# Allegro board CC26xx_4x4_Ext_Reg_lvl_shifter.brd
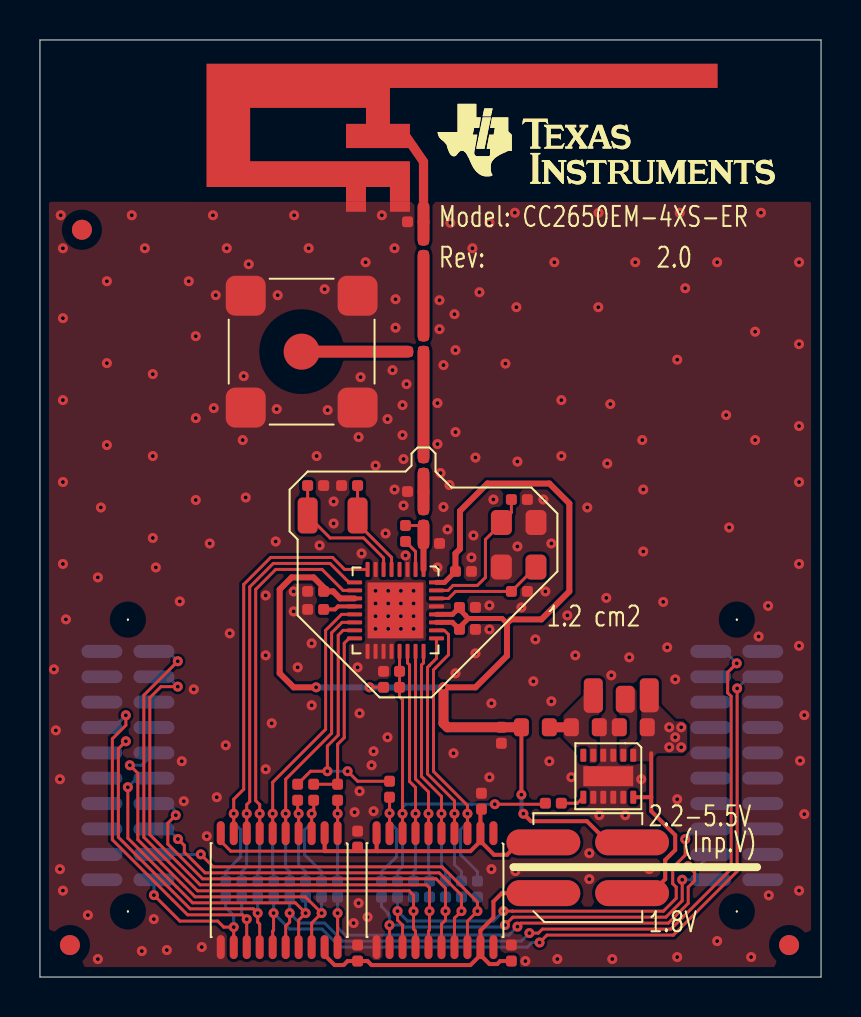
[diagram p0: board, top side]
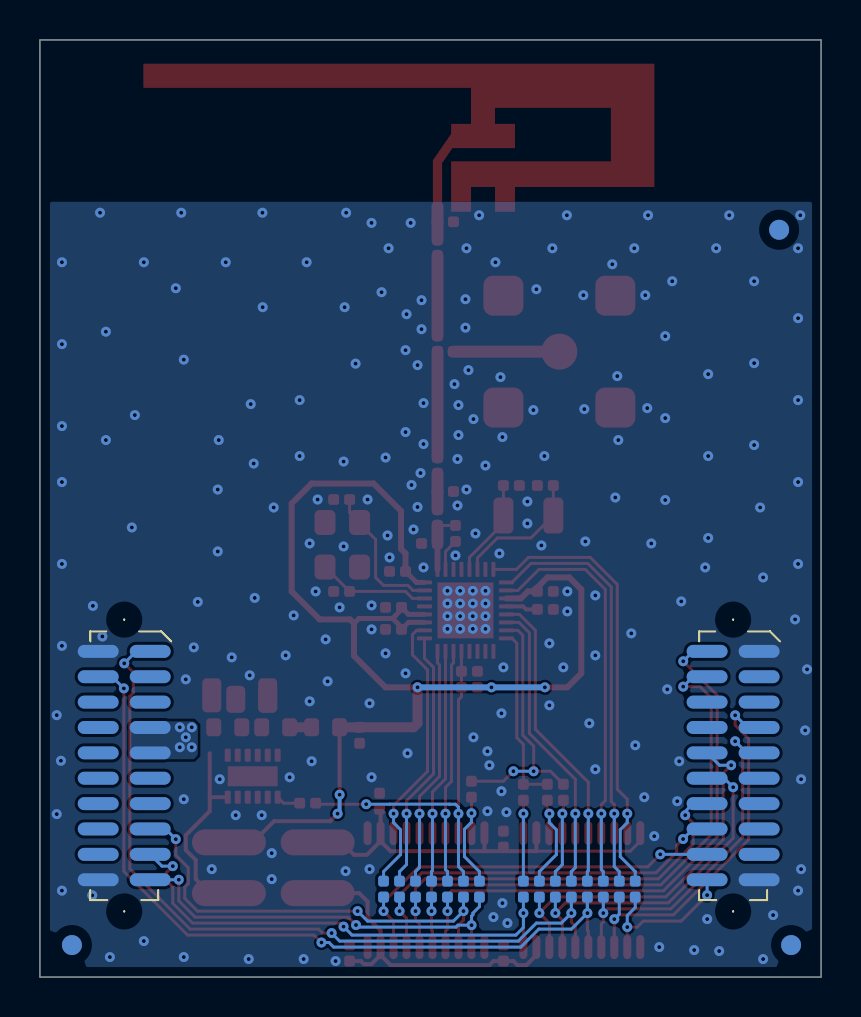
[diagram p1: board, bottom side, seen from below]

Outline 39.1 x 46.9 mm; copper layers: TOP, BOTTOM. Coordinates in mm from the lower left corner of the outline.
Outline path: 0,46.9 0,0 39.1,0 39.1,46.9 0,46.9

## Placement (name value [footprint] x y rotation side)
A1  2.4GHz  [ANTENNA_DN007N]  19.2 38.55 0 top
C2  2.2uF  [CAPC1005X60L]  23.1 12.5 270 top
C3  100nF  [CAPC1005X60L]  14.2 19.3 180 top
C4  100nF  [CAPC1005X60L]  21 17.4 0 top
C5  10uF  [CAPC1608X90L]  30.4 12.5 180 top
C8  10uF  [CAPC1608X90L]  26.6 12.5 0 top
C9  100nF  [CAPC1005X60L]  21 18.5 0 top
C12  1.2pF  [CAPC1005X60L]  19.2 21.7 0 top
C13  1.2pF  [CAPC1005X60L]  19.2 24.3 180 top
C14  12pF  [CAPC1005X60L]  19.2 25.2 90 top
C15  DNM  [CAPC1005X60L]  19.2 37.8 180 top
C16  100nF  [CAPC1005X60L]  20.8 20.3 0 top
C17  12pF  [CAPC1005X60L]  15.9 24.6 180 top
C18  12pF  [CAPC1005X60L]  13.4 24.6 0 top
C19  1uF  [CAPC1005X60L]  14.2 18.4 180 top
C20  100nF  [CAPC1005X60L]  18 15.3 180 top
C22  DNM  [CAPC1005X60L]  23.6 19.3 0 top
C23  DNM  [CAPC1005X60L]  23.6 23.9 0 top
C24  100nF  [CAPC1005X60L]  15.9 6.5 90 top
C25  100nF  [CAPC1005X60L]  15.9 0.8 90 top
C26  100nF  [CAPC1005X60L]  22.1 8.4 90 top
C27  100nF  [CAPC1005X60L]  23.6 0.8 90 top
FIDU1  FIDU_1MM  [FID100X115]  1.5 1.6 0 top
FIDU2  FIDU_1MM  [FID100X115]  2.1 37.4 0 top
FIDU3  FIDU_1MM  [FID100X115]  37.5 1.6 0 top
FIDU4  FIDU_1MM  [FID100X115]  1.5 1.6 180 bottom
FIDU5  FIDU_1MM  [FID100X115]  2.1 37.4 180 bottom
FIDU6  FIDU_1MM  [FID100X115]  37.5 1.6 180 bottom
FL1  BLM18HE152SN1  [FIL_BLM18HE152SN1DL]  24.1 12.5 0 top
J1  SMA-10V21-TGG  [HUSTSAN_SMA10V21TGGAN]  13.1 31.3 0 top
L1  2.2uH  [INDC2012X100L]  29.3 13.9 180 top
L12  2nH  [INDC1005X60L]  19.2 22.6 90 top
L21  15nH  [INDC1005X60L]  18.3 21.8 90 top
NOREF  -  []  0 45.86 0 top
NOREF#2  -  []  20.9 43.7 0 top
NOREF#3  -  []  33.58 0 90 top
P1  SFM-110-02-S-D-A-K-TR  [SAMTEC_SFM11002AN]  3.1 16.3 0 bottom
P2  SFM-110-02-S-D-A-K-TR  [SAMTEC_SFM11002AN]  33.58 16.3 0 bottom
P3  0015912040  [MOLEX_0015912040-4N]  25.2 4.2 0 top
R1  100k  [RESC1005X40L]  18 14.5 180 top
R10  DNM  [RESC1005X40L]  18.4 31.3 0 top
R11  0  [RESC1005X40L]  19.2 32.1 270 top
R12  0  [RESC1005X40L]  19.2 36.9 270 top
R15  DNM  [RESC1005X40L]  14.9 9.65 270 top
R16  DNM  [RESC1005X40L]  17.5 9.8 270 top
R17  0  [RESC1005X40L]  13.7 8.85 90 top
R18  0  [RESC1005X40L]  12.9 8.85 90 top
R19  DNM  [RESC3216X75L]  30.5 14.1 180 top
R20  0  [RESC1005X40L]  25.3 8.7 0 top
R21  DNM  [RESC1005X40L]  14.9 4.8 270 bottom
R22  DNM  [RESC1005X40L]  14.1 4.8 270 bottom
R23  DNM  [RESC1005X40L]  13.3 4.8 270 bottom
R24  DNM  [RESC1005X40L]  12.5 4.8 270 bottom
R25  DNM  [RESC1005X40L]  11.7 4.8 270 bottom
R26  DNM  [RESC1005X40L]  10.9 4.8 270 bottom
R27  DNM  [RESC1005X40L]  10.1 4.8 270 bottom
R28  DNM  [RESC1005X40L]  9.3 4.8 270 bottom
R29  DNM  [RESC1005X40L]  21.9 4.8 270 bottom
R30  DNM  [RESC1005X40L]  21.1 4.8 270 bottom
R31  DNM  [RESC1005X40L]  20.3 4.8 270 bottom
R32  DNM  [RESC1005X40L]  19.5 4.8 270 bottom
R33  DNM  [RESC1005X40L]  18.7 4.8 270 bottom
R34  DNM  [RESC1005X40L]  17.9 4.8 270 bottom
R35  DNM  [RESC1005X40L]  17.1 4.8 270 bottom
U1  CC26XX_4X4  [QFNFC40P400X400X100-33L]  19.2 20.4 180 top
U2  TPS62740  [SON50P300X200X80-12L]  29.7 11.1 180 top
U3  TXS0108  [TSSOP65P640X120-20L]  14.9 7.2 180 top
U4  TXS0108  [TSSOP65P640X120-20L]  22.7 7.2 180 top
Y1  32.768kHz  [XTAL_FC-135N]  15.9 23.1 180 top
Y2  24MHz  [OSCCC250X320X60-4L]  23.1 22.75 270 top

## Library data of the parts
A1 = ANTENNA_DN007
C2-C4 C9 C12-C20 C22-C27 = CAPACITOR: alternate symbols: (CAPC1005X60L,CAPC1005X60M)
C5 C8 = CAPACITOR: alternate symbols: (CAPC1608X90L,CAPC1608X90M)
FIDU1-FIDU6 = FIDMARK
FL1 = FILTER_2PIN: alternate symbols: (FIL_BLM18HE152SN1DL,FIL_BLM18HE152SN1DM)
J1 = CONN_COAX_1+4: alternate symbols: (HUSTSAN_SMA10V21TGGL,HUSTSAN_SMA10V21TGGM)
L1 = INDUCTOR: alternate symbols: (INDC2012X100L,INDC2012X100M)
L12 = INDUCTOR: alternate symbols: (INDC1005X60L,INDC1005X60M)
L21 = INDUCTOR_HOR: alternate symbols: (INDC1005X60L,INDC1005X60M)
P1 P2 = CONN_HEADER_2X10_P_S
P3 = CONN_HEADER_2X2_AB: alternate symbols: (MOLEX_0015912040-4L,MOLEX_0015912040-4M)
R1 R10-R12 R15-R18 R20-R35 = RESISTOR: alternate symbols: (RESC1005X40L,RESC1005X40M)
R19 = RESISTOR: alternate symbols: (RESC3216X75L,RESC3216X75M)
U1 = IC_RF_CC26XX_QFN32_2: alternate symbols: (QFNFC40P400X400X100-33L,QFNFC40P400X400X100-33M)
U2 = IC_PM_TPS62740_SON12: User Part Number: #PN; alternate symbols: (SON50P300X200X80-12L,SON50P300X200X80-12M)
U3 U4 = IC_PERIPH_TXS0108EPWR_SO20_3: alternate symbols: (TSSOP65P640X120-20L,TSSOP65P640X120-20M)
Y1 = CRYSTAL: alternate symbols: (XTAL_FC-135L,XTAL_FC-135M)
Y2 = XTAL_4PIN_S: alternate symbols: (OSCCC250X320X60-4L,OSCCC250X320X60-4M)

## Footprints (pads in the part's own frame, mm; a bottom-side part is the same pattern mirrored in y, then rotated)
ANTENNA_DN007N
  rect 0.46x0.5 smd: 1(0,0)
  rect 1x0.5 smd: 2(-1.18,0) 3(-3.38,0)
CAPC1005X60L
  custom 0.55x0.54 smd: 1(0,0) 2(0.8,0)
CAPC1608X90L
  custom 0.75x0.9 smd: 1(0,0) 2(1.4,0)
FID100X115
  oval 1x1 smd: 1(0,0)
FIL_BLM18HE152SN1DL
  custom 0.75x0.9 smd: 1(0,0) 2(1.4,0)
HUSTSAN_SMA10V21TGGAN
  round 1.801 smd: 1(0,0)
  custom 2x2 smd: 2(-2.8,-2.8) 3(2.8,-2.8) 4(2.8,2.8) 5(-2.8,2.8)
INDC1005X60L
  custom 0.55x0.54 smd: 1(0,0) 2(0.8,0)
INDC2012X100L
  custom 0.95x1.352 smd: 1(0,0) 2(1.6,0)
MOLEX_0015912040-4N
  oval 3.7x1.3 smd: A1(0,0) A2(0,2.54) B1(4.44,0) B2(4.44,2.54)
OSCCC250X320X60-4L
  custom 1.25x1.05 smd: 1(0,0) 2(2.23,0) 3(2.23,1.73) 4(0,1.73)
QFNFC40P400X400X100-33L
  custom 0.198x0.752 smd: 1(0,0) 2(0.4,0) 3(0.8,0) 4(1.2,0) 5(1.6,0) 6(2,0) 7(2.4,0) 8(2.8,0) 17(2.8,4.1) 18(2.4,4.1) 19(2,4.1) 20(1.6,4.1) 21(1.2,4.1) 22(0.8,4.1) 23(0.4,4.1) 24(0,4.1)
  custom 0.752x0.198 smd: 9(3.45,0.65) 10(3.45,1.05) 11(3.45,1.45) 12(3.45,1.85) 13(3.45,2.25) 14(3.45,2.65) 15(3.45,3.05) 16(3.45,3.45) 25(-0.65,3.45) 26(-0.65,3.05) 27(-0.65,2.65) 28(-0.65,2.25) 29(-0.65,1.85) 30(-0.65,1.45) 31(-0.65,1.05) 32(-0.65,0.65)
  rect 2.799x2.799 smd: 33(1.4,2.05)
RESC1005X40L
  custom 0.55x0.54 smd: 1(0,0) 2(0.8,0)
RESC3216X75L
  custom 0.95x1.7 smd: 1(0,0) 2(2.8,0)
SAMTEC_SFM11002AN
  round 0.099 hole 1.501 unplated: (1.302,-1.588) (1.302,13.017)
  oval 2.05x0.65 smd: 1(0,0) 2(2.604,0) 3(0,1.27) 4(2.604,1.27) 5(0,2.54) 6(2.604,2.54) 7(0,3.81) 8(2.604,3.81) 9(0,5.08) 10(2.604,5.08) 11(0,6.35) 12(2.604,6.35) 13(0,7.62) 14(2.604,7.62) 15(0,8.89) 16(2.604,8.89) 17(0,10.16) 18(2.604,10.16) 19(0,11.43) 20(2.604,11.43)
SON50P300X200X80-12L
  custom 0.3x0.65 smd: 1(0,0) 2(0.5,0) 3(1,0) 4(1.5,0) 5(2,0) 6(2.5,0) 7(2.5,2.1) 8(2,2.1) 9(1.5,2.1) 10(1,2.1) 11(0.5,2.1) 12(0,2.1)
  rect 2.499x1.001 smd: 13(1.25,1.05)
TSSOP65P640X120-20L
  oval 0.4x1.2 smd: 1(0,0) 2(0.65,0) 3(1.3,0) 4(1.95,0) 5(2.6,0) 6(3.25,0) 7(3.9,0) 8(4.55,0) 9(5.2,0) 10(5.85,0) 11(5.85,5.7) 12(5.2,5.7) 13(4.55,5.7) 14(3.9,5.7) 15(3.25,5.7) 16(2.6,5.7) 17(1.95,5.7) 18(1.3,5.7) 19(0.65,5.7) 20(0,5.7)
XTAL_FC-135N
  custom 1x1.8 smd: 1(0,0) 2(2.5,0)

## Nets
GND: A1.2(GND_2) A1.3(GND_3) C2.2 C3.2 C4.2 C5.2 C8.2 C9.2 C12.2 C13.2 C15.2 C16.2 C17.2 C18.2 C19.2 C20.2 C22.2 C23.2 C24.2 C25.2 C26.2 C27.2 J1.2 J1.3 J1.4 J1.5 P1.1 P1.19 P2.2 P2.20 U1.3(VSS#3) U1.7(VSS#7) U1.17(VSS#17) U1.18(DCDC_SW) U1.19(VDDS_DCDC) U1.20(VSS#20) U1.29(VSS#29) U1.33(EGP) U2.3(GND) U2.4(CTRL) U2.8(VSEL4) U2.9(VSEL3) U2.10(VSEL2) U2.11(VSEL1) U2.13(EGP) U3.11(GND) U4.11(GND) Y2.2 Y2.4
VDD_EB: C5.1 P2.7 P2.9 P3.B1 R19.1 U2.1(VIN) U2.12(EN)
VDDR: C2.1 C3.1 C4.1 C9.1 C16.1 FL1.1 P3.B2 R1.2 U1.11(VDDS2) U1.27(VDDS) U1.28(VDDR#28) U1.32(VDDR#32)
DIO3: R18.1 R23.1 U3.4(A3)
DIO4: R17.1 R22.1 U3.3(A2)
DIO_0: R28.1 U1.8(DIO_0) U3.9(A8)
DIO_0_EB: P1.20 R28.2 U3.12(B8)
DIO_1: R27.1 U1.9(DIO_1) U3.8(A7)
DIO_1_EB: P1.7 R27.2 U3.13(B7)
DIO_2: R26.1 U1.10(DIO_2) U3.7(A6)
DIO_2_EB: P1.9 R26.2 U3.14(B6)
DIO_3/JTAG_TDO: R16.1 R18.2 U1.15(DIO_3)
DIO_3_EB: P1.12 R23.2 U3.17(B3)
DIO_4/JTAG_TDI: R15.1 R17.2 U1.16(DIO_4)
DIO_4_EB: P1.10 R22.2 U3.18(B2)
DIO_5: R33.1 U1.22(DIO_5) U4.7(A6)
DIO_5_EB: P1.2 R33.2 U4.14(B6)
DIO_6: R32.1 U1.23(DIO_6) U4.6(A5)
DIO_6_EB: P1.4 R32.2 U4.15(B5)
DIO_7: R31.1 U1.24(DIO_7) U4.5(A4)
DIO_7_EB: P1.14 R31.2 U4.16(B4)
DIO_8: R30.1 U1.25(DIO_8) U4.4(A3)
DIO_8_EB: P1.16 R30.2 U4.17(B3)
DIO_9: R29.1 U1.26(DIO_9) U4.3(A2)
DIO_9_EB: P1.18 R29.2 U4.18(B2)
JTAG_TCK: R24.1 U1.14(JTAG_TCKC) U3.5(A4)
JTAG_TCK_EB: P2.1 R24.2 U3.16(B4)
JTAG_TDI_EB: P2.17 R21.2 U3.20(B1)
JTAG_TDO_EB: P2.19 R35.2 U4.12(B8)
JTAG_TMS: R25.1 U1.13(JTAG_TMSC) U3.6(A5)
JTAG_TMS_EB: P2.4 R25.2 U3.15(B5)
NRESET: C20.1 R1.1 R20.1 R34.1 U1.21(RESET_N) U4.8(A7)
NRESET_EB: P2.15 R34.2 U4.13(B7)
RF_P: C12.1 L12.1 L21.2 U1.1(RF_P)
TDI: R15.2 R21.1 U3.1(A1)
TDO: R16.2 R35.1 U4.9(A8)
X24M_N: C22.1 U1.30(X24M_N) Y2.3
X24M_P: C23.1 U1.31(X24M_P) Y2.1
N309359: C19.1 U1.12(DCOUPL)
N320943: C17.1 U1.5(X32K_Q1) Y1.1
N320947: C18.1 U1.6(X32K_Q2) Y1.2
N323490: C14.2 R10.2 R11.2
N323894: A1.1(FEED_1) C15.1 R12.1
N337846: R11.1 R12.2
N337994: J1.1 R10.1
N415890: L1.1 U2.2(SW)
N415894: C8.1 FL1.2 L1.2 R19.2 U2.5(VOUT)
N420184: C13.1 C14.1 L12.2
N420268: L21.1 U1.2(RF_N)
N423620: C24.1 C26.1 P3.A2 U3.2(VCCA) U3.10(OE) U4.2(VCCA) U4.10(OE)
N423851: C25.1 C27.1 P3.A1 U3.19(VCCB) U4.19(VCCB)
N434222: R20.2 U2.7(PG)

Pads without a net: FIDU1 1; FIDU2 1; FIDU3 1; FIDU4 1; FIDU5 1; FIDU6 1; P1 3 5 6 8 11 13 15 17; P2 3 5 6 8 10 11 12 13 14 16 18; U1 4; U2 6; U4 1 20

## Via types
v1: diameter 0.5, hole 0.2, TOP to BOTTOM, 278 vias

## Routing (per net, layer and track width the routed paths; a pad name or vN(x,y) marks a point on that pad's centre or on a via; arc(x,y) is an arc through that point)
GND: length 0.3
  TOP w0.15: C5.2 28.8,12.5 ; C8.2 28.1,12.5
  vias: v1(0.7,15.4) v1(0.8,12.34) v1(1.04,38.13) v1(1,9.9) v1(1,5.4) v1(1.15,36.48) v1(1.15,32.97) v1(1.15,28.88) v1(1.15,24.77) v1(1.15,20.67) v1(1.15,4.33) v1(1.3,17.9) v1(2.4,3.1) v1(2.9,20) v1(2.9,0.9) v1(3.05,23.5) v1(3.35,34.83) v1(3.35,30.72) v1(3.35,26.62) v1(4.6,38.13) v1(5.1,1.3) v1(5.25,36.48) v1(5.65,30.17) v1(5.65,26.08) v1(5.65,21.97) v1(5.7,2.9) v1(5.8,20.5) v1(6.35,1.35) v1(7,18.8) v1(7.1,10.8) v1(7.2,8.8) v1(7.45,34.83) v1(7.7,14.4) v1(7.8,32.08) v1(7.8,27.97) v1(7.8,23.88) v1(8.1,1.5) v1(8.35,7.05) v1(8.5,21.7) v1(8.66,38.13) v1(8.7,28.47) v1(8.8,34.12) v1(8.85,9) v1(9.35,36.48) v1(9.3,11.6) v1(9.5,17.2) v1(10.15,26.88) v1(10.2,30.08) v1(10.3,24) v1(10.45,35.67) v1(11.3,19.1) v1(11.3,16.1) v1(11.3,10.4) v1(11.6,12.7) v1(11.8,21.8) v1(11.9,34.12) v1(11.85,28.42) v1(12.72,38.13) v1(12.7,19.3) v1(12.7,18.3) v1(12.9,15.5) v1(13.45,36.48) v1(13.6,16.7) v1(13.6,13.6) v1(13.85,26.08) v1(14,21.6) v1(14.25,34.42) v1(14.4,28.38) v1(14.7,23.8) v1(14.7,22.7) v1(15.7,2.7) v1(15.75,8.25) v1(15.95,27.02) v1(15.9,15.5) v1(15.95,3.7) v1(16,13.2) v1(16,9.3) v1(16.05,30.02) v1(16.1,21.2) v1(16.3,35.77) v1(16.4,3) v1(16.6,10.6) v1(16.7,11.3) v1(16.7,8.3) v1(16.8,25.6) v1(16.8,19.33) v1(16.8,18.69) v1(16.8,18.06) v1(16.8,17.42) v1(17.11,38.13) v1(17.3,22.2) v1(17.4,27.92) v1(17.43,19.33) v1(17.43,18.69) v1(17.43,18.06) v1(17.43,17.42) v1(17.4,12) v1(17.65,30.38) v1(17.75,36.48) v1(17.8,33.92) v1(17.8,32.5) v1(17.75,24.4) v1(18.15,28.62) v1(18.15,27.12) v1(18.07,19.33) v1(18.07,18.69) v1(18.07,18.06) v1(18.07,17.42) v1(18.2,25.92) v1(18.2,23.6) v1(18.35,29.67) v1(18.3,21.1) v1(18.7,19.33) v1(18.7,18.69) v1(18.7,18.06) v1(18.7,17.42) v1(19.9,28.72) v1(19.9,26.67) v1(19.9,20.5) v1(20,33.88) v1(20,32.42) v1(20.05,25.22) v1(20.2,30.62) v1(20.2,23.52) v1(20.4,22.4) v1(20.54,37.74) v1(20.5,24.62) v1(20.7,11.2) v1(20.75,33.17) v1(20.8,31.38) v1(20.8,27.27) v1(20.8,15.2) v1(21.6,21) v1(21.65,36.48) v1(21.7,22.1) v1(21.8,26) v1(21.8,16.2) v1(22,34.27) v1(22.5,37.74) v1(22.5,18.6) v1(22.5,17.4) v1(22.5,10) v1(22.6,13.7) v1(22.6,5.4) v1(22.7,23.9) v1(23.3,30.7) v1(23.77,38.25) v1(23.8,5.3) v1(23.85,33.52) v1(23.9,25.8) v1(23.9,21.55) v1(24.1,18.5) v1(24.3,0.8) v1(24.7,14.8) v1(24.8,16.9) v1(25.2,23.9) v1(25.3,19.3) v1(25.5,10.8) v1(25.6,21.7) v1(25.6,13.8) v1(25.75,35.77) v1(25.9,0.9) v1(26.1,28.88) v1(26.1,26.08) v1(26.4,18.1) v1(26.6,10) v1(26.8,16.1) v1(27.4,23.5) v1(27.5,6.2) v1(27.5,4.9) v1(27.95,33.52) v1(27.96,38.25) v1(28,8.1) v1(28.35,18.97) v1(28.4,25.7) v1(28.55,28.67) v1(28.6,15.1) v1(28.65,0.9) v1(29.3,8.1) v1(29.5,16) v1(29.8,35.77) v1(30.1,9.9) v1(30.15,26.88) v1(30.2,24.4) v1(30.2,21.3) v1(30.5,5.4) v1(31.2,18.77) v1(31.4,16.5) v1(31.8,14.9) v1(31.9,30.9) v1(31.9,8.9) v1(31.9,1) v1(32.03,38.25) v1(32.3,34.48) v1(33.9,35.77) v1(33.9,1.8) v1(34.35,28.12) v1(34.5,22.5) v1(35.6,1) v1(35.8,32.3) v1(35.8,26.88) v1(35.97,17.04) v1(36.09,38.25) v1(36.45,18.58) v1(36.48,4.09) v1(38,35.77) v1(38,31.67) v1(38,27.58) v1(38,24.77) v1(38,20.67) v1(38,16.58) v1(38.05,10.83) v1(38,4.33) v1(38.26,13.11) v1(38.26,8.15)
VDD_EB: length 9.9
  TOP w0.2: 30.6,9 30.6,11.2 ; 30.6,9 30.6,8.3 31.8,7.1 31.8,6.36 31.3,5.86 31.3,4.9 30.6,4.2 P3.B1 ; 30.6,9 U2.12
  vias: v1(31.5,12.5) v1(31.5,11.5) v1(31.8,12) v1(32.1,12.5) v1(32.1,11.5)
VDDR: length 64.6
  TOP w0.15: R1.2 v1(16.5,14.5)
  TOP w0.2: v1(24.1,9.12) FL1.1 ; P3.B2 28.44,6.74 27.38,7.8 24.57,7.8 v1(24.2,8.17)
  TOP w0.25: 21.44,17.94 21.3,18.09 21.3,18.1 21,18.4 C9.1 20.65,18.15 U1.28 ; 21.44,17.94 21,17.5 C4.1 20.65,17.75 U1.27 ; 21.44,17.94 23.13,17.94 23.38,17.7 ; U1.32 20.25,19.75 C16.1
  TOP w0.3: v1(13.82,14.5) 12.7,14.5 12,15.2 12,19.4 12.6,20 13.7,20 14.2,19.5 C3.1 14.68,19.3 15.03,18.95 U1.11 ; v1(20.2,14.5) 21.8,14.5 23.38,16.08 23.38,17.7 23.58,17.9 25.1,17.9 26.5,19.3 26.5,23.7 25.5,24.7 22.4,24.7 21.02,23.33 21.02,21.42 20.8,21.2 C16.1
  TOP w0.5: FL1.1 C2.1 20.4,12.5 20.2,12.7 v1(20.2,14.5)
  BOTTOM w0.2: v1(24.1,9.12) 24.1,8.27 v1(24.2,8.17)
  BOTTOM w0.3: v1(20.2,14.5) v1(16.5,14.5) v1(13.82,14.5)
DIO3: length 5.2
  TOP w0.15: U3.4 v1(12.95,8.18) 12.95,8.35 12.9,8.4 R18.1
  BOTTOM w0.15: R23.1 13.3,5.28 12.95,5.63 v1(12.95,8.18)
DIO4: length 5.6
  TOP w0.15: U3.3 v1(13.6,8.18) 13.6,8.3 13.71,8.41 13.71,8.84 R17.1
  BOTTOM w0.15: R22.1 14.1,5.28 13.25,6.13 13.25,7.38 13.6,7.72 v1(13.6,8.18)
DIO_0: length 23.5
  TOP w0.15: U3.9 v1(9.7,8.18) 9.7,8.9 10.2,9.4 10.2,19.65 11.55,21 14.65,21 15.25,20.4 U1.8
  BOTTOM w0.15: v1(9.7,8.18) 9.7,7.72 10.05,7.38 10.05,6.03 9.3,5.28 R28.1
DIO_0_EB: length 8.1
  TOP w0.15: U3.12 v1(9.7,2.5) 9.2,2.5 8.9,2.8 7,2.8 v1(5.7,4.1)
  BOTTOM w0.15: v1(9.7,2.5) 9.7,3.08 9.3,3.48 R28.2 ; v1(5.7,4.1) P1.20
DIO_1: length 22
  TOP w0.15: U1.9 15.47,19.75 14.52,20.7 11.67,20.7 10.5,19.52 10.5,8.78 10.35,8.63 v1(10.35,8.18) U3.8
  BOTTOM w0.15: R27.1 10.1,5.28 10.35,5.53 v1(10.35,8.18)
DIO_1_EB: length 18.9
  TOP w0.15: U3.13 v1(10.35,2.9) 10.13,3.11 7.39,3.11 6.66,3.84 6.43,4.07 5.77,4.72 3.62,6.87 3.62,11.92 4.3,12.6 v1(4.3,13.1)
  BOTTOM w0.15: v1(10.35,2.9) 10.1,3.15 R27.2 ; P1.7 3.69,12.49 v1(4.3,13.1)
DIO_2: length 21.5
  TOP w0.15: U3.7 v1(11,8.18) 11,8.63 10.8,8.83 10.8,19.4 11.8,20.4 14.12,20.4 15.17,19.35 U1.10
  BOTTOM w0.15: R26.1 10.9,5.28 11,5.38 v1(11,8.18)
DIO_2_EB: length 17.5
  TOP w0.15: v1(4.3,11.8) 3.92,11.42 3.92,7 6.64,4.28 7.52,3.41 10.68,3.41 v1(10.9,3.2) 10.9,2.75 11,2.65 U3.14
  BOTTOM w0.15: v1(4.3,11.8) 3.72,11.22 P1.9 ; R26.2 v1(10.9,3.2)
DIO_3/JTAG_TDO: length 13
  TOP w0.15: v1(15.4,10.3) 15.9,9.8 R16.1 ; R18.2 12.9,9.66 13.54,10.3 v1(14.39,10.3) 14.39,11.56 14.93,12.11 14.93,17.11 15.17,17.35 U1.15
  BOTTOM w0.15: v1(14.39,10.3) v1(15.4,10.3)
DIO_3_EB: length 17.1
  TOP w0.15: U3.17 12.95,2.85 v1(13.3,3.2) 12.78,3.72 7.64,3.72 6.86,4.49 6.85,4.5 5.1,6.25 5.1,6.25 4.4,6.95 v1(4.4,9.5)
  BOTTOM w0.15: v1(13.3,3.2) R23.2 ; v1(4.4,9.5) 4.85,9.95 P1.12
DIO_4/JTAG_TDI: length 9
  TOP w0.15: R17.2 R15.1 14.9,11.65 15.23,11.98 15.23,16.71 15.47,16.95 U1.16
DIO_4_EB: length 18.8
  TOP w0.15: v1(4.5,10.6) 4.9,10.2 4.9,7.13 4.9,7.12 4.9,6.88 5.4,6.38 5.4,6.37 6.1,5.67 7.08,4.7 7.23,4.55 7.23,4.55 7.77,4.02 13.28,4.02 v1(14.1,3.2) 13.6,2.7 U3.18
  BOTTOM w0.15: v1(4.5,10.6) 5.08,10.6 P1.10 ; R22.2 v1(14.1,3.2)
DIO_5: length 12.7
  TOP w0.15: U1.22 18.4,15.72 18.5,15.62 18.5,9.79 18.8,9.49 v1(18.8,8.18) U4.7
  BOTTOM w0.15: v1(18.8,8.18) 18.8,5.38 18.7,5.28 R33.1
DIO_5_EB: length 29
  TOP w0.15: v1(6.9,15.8) 5.2,14.1 5.2,7 7.35,4.85 7.35,4.85 7.89,4.31 18.48,4.31 18.7,4.1 v1(18.7,3.3) 18.7,2.4 18.8,2.3 U4.14
  BOTTOM w0.15: P1.2 6.4,16.3 v1(6.9,15.8) ; R33.2 v1(18.7,3.3)
DIO_6: length 12.8
  TOP w0.15: U4.6 v1(19.45,8.18) 19.45,9.27 18.8,9.91 U1.23
  BOTTOM w0.15: R32.1 19.5,5.28 19.45,5.33 v1(19.45,8.18)
DIO_6_EB: length 28.7
  TOP w0.15: U4.15 19.45,2.3 19.5,2.35 v1(19.5,3.3) 19.5,4.47 19.35,4.61 8.02,4.61 5.5,7.13 5.5,13.98 6.05,14.53 v1(6.9,14.53)
  BOTTOM w0.15: R32.2 v1(19.5,3.3) ; v1(6.9,14.53) 6.4,15.03 P1.4
DIO_7: length 13
  TOP w0.15: U4.5 v1(20.1,8.18) 20.1,9.04 19.1,10.04 19.1,15.62 19.2,15.72 U1.24
  BOTTOM w0.15: R31.1 20.3,5.28 20.1,5.48 v1(20.1,8.18)
DIO_7_EB: length 21.6
  TOP w0.15: U4.16 20.1,2.65 20.3,2.85 v1(20.3,3.3) 20.3,4.44 19.83,4.91 8.14,4.91 6.4,6.66 6.4,7.7 v1(6.8,8.1)
  BOTTOM w0.15: v1(6.8,8.1) 6.8,8.28 6.4,8.68 P1.14 ; R31.2 v1(20.3,3.3)
DIO_8: length 14
  TOP w0.15: U1.25 19.85,15.95 19.5,15.6 19.5,15.6 19.4,15.5 19.4,10.16 20.75,8.81 v1(20.75,8.18) U4.4
  BOTTOM w0.15: v1(20.75,8.18) 20.75,5.63 21.1,5.28 R30.1
DIO_8_EB: length 20.4
  TOP w0.15: v1(6.91,6.91) 7.23,6.59 7.23,6.25 8.27,5.22 19.98,5.22 21.1,4.1 v1(21.1,3.3) 20.75,2.95 U4.17
  BOTTOM w0.15: P1.16 6.4,7.41 v1(6.91,6.91) ; R30.2 v1(21.1,3.3)
DIO_9: length 15.5
  TOP w0.15: U1.26 20.24,17.35 20.45,17.14 20.45,16.13 19.8,15.48 19.8,15.47 19.7,15.37 19.7,10.29 21.4,8.59 v1(21.4,8.18) U4.3
  BOTTOM w0.15: v1(21.4,8.18) 21.4,7.72 21.05,7.38 21.05,6.13 21.9,5.28 R29.1
DIO_9_EB: length 20.3
  TOP w0.15: v1(8.05,6.14) 8.67,5.52 20.14,5.52 21.9,3.75 v1(21.9,3.3) 21.4,2.8 U4.18
  BOTTOM w0.15: P1.18 v1(8.05,6.14) ; R29.2 v1(21.9,3.3)
JTAG_TCK: length 15.8
  TOP w0.15: U1.14 15.12,17.75 14.6,17.23 14.6,12.2 12.3,9.9 v1(12.3,8.18) U3.5
  BOTTOM w0.15: v1(12.3,8.18) 12.3,5.48 12.5,5.28 R24.1
JTAG_TCK_EB: length 38.9
  TOP w0.15: v1(12.5,3.2) 12.5,2.75 12.3,2.55 U3.16 ; v1(34.88,15.7) 34.42,15.24 34.42,14.22 34.6,14.05 34.6,5.41 31.58,2.4 25.15,2.4 24.95,2.2 v1(24.5,2.2)
  BOTTOM w0.15: P2.1 34.28,16.3 v1(34.88,15.7) ; R24.2 v1(12.5,3.2) 13,2.7 14.25,2.7 15.15,1.8 24.1,1.8 v1(24.5,2.2)
JTAG_TDI_EB: length 25.1
  TOP w0.15: v1(32.45,5.55) 32.77,5.23 32.77,4.82 32.45,4.5 32.45,3.69 31.46,2.7 24.08,2.7 v1(23.9,2.52) ; U3.20 v1(14.9,3.2)
  BOTTOM w0.15: v1(32.45,5.55) 32.99,5.55 P2.17 ; v1(23.9,2.52) 23.48,2.1 15.28,2.1 14.9,2.48 v1(14.9,3.2) R21.2
JTAG_TDO_EB: length 20.4
  TOP w0.15: v1(17.5,2.6) 17.5,2.59 U4.12 ; v1(32.15,4.87) 32.15,3.81 31.33,3 23.67,3 v1(23.28,2.6)
  BOTTOM w0.15: P2.19 v1(32.15,4.87) ; R35.2 17.1,3.52 17.42,3.2 17.42,3.12 17.5,3.05 v1(17.5,2.6) 18.18,2.6 18.27,2.5 23.18,2.5 v1(23.28,2.6)
JTAG_TMS: length 16.4
  TOP w0.15: U3.6 v1(11.65,8.18) 11.65,9.75 14.3,12.4 14.3,17.35 15.1,18.15 U1.13
  BOTTOM w0.15: R25.1 11.7,5.28 11.65,5.33 v1(11.65,8.18)
JTAG_TMS_EB: length 38.7
  TOP w0.15: v1(34.9,14.45) 34.9,5.54 34.9,5.29 31.71,2.1 25.38,2.1 v1(25.01,1.73) ; U3.15 11.65,2.3 11.69,2.35 v1(11.69,3.2)
  BOTTOM w0.15: P2.4 35.48,15.03 v1(34.9,14.45) ; R25.2 11.7,3.52 11.69,3.52 v1(11.69,3.2) 12.49,2.4 14.13,2.4 15.03,1.5 24.4,1.5 24.63,1.73 v1(25.01,1.73)
NRESET: length 20.2
  TOP w0.15: v1(22.77,8.65) 25.25,8.65 R20.1 ; U4.8 v1(18.15,8.18) 18.15,13.88 18,14.03 R1.1 C20.1 U1.21
  BOTTOM w0.15: v1(22.77,8.65) 21.6,8.65 21.6,8.65 18.6,8.65 18.6,8.65 18.3,8.65 18.15,8.5 v1(18.15,8.18) 18.15,5.53 17.9,5.28 R34.1
NRESET_EB: length 22
  TOP w0.15: v1(17.9,3.3) 17.9,2.85 18.15,2.6 U4.13 ; v1(23.2,3.3) 23.65,3.3 23.65,3.3 31.21,3.3 31.85,3.94 31.85,4.5 31.67,4.67 31.67,5.47 32.3,6.1 v1(32.3,6.9)
  BOTTOM w0.15: P2.15 32.81,7.41 v1(32.3,6.9) ; R34.2 v1(17.9,3.3) 18.4,2.8 22.7,2.8 v1(23.2,3.3)
RF_P: length 3.1
  TOP w0.15: L21.2 L12.1
  TOP w0.3: C12.1 U1.1
  TOP w0.6: C12.1 L12.1
TDI: length 5
  TOP w0.15: U3.1 v1(14.9,8.18) R15.2
  BOTTOM w0.15: v1(14.9,8.18) R21.1
TDO: length 5.7
  TOP w0.15: U4.9 v1(17.5,8.2) R16.2
  BOTTOM w0.15: v1(17.5,8.2) 17.5,7.75 17.85,7.4 17.85,6.03 17.1,5.28 R35.1
X24M_N: length 5.6
  TOP w0.15: Y2.3 24.82,20.52 C22.1 20.8,19.3 20.45,18.95 U1.30
X24M_P: length 7.2
  TOP w0.15: C23.1 23.6,23.25 Y2.1 23.1,22.7 22.3,21.9 22.3,20 21.9,19.6 20.68,19.6 20.43,19.35 U1.31
N309359: length 1.6
  TOP w0.2: U1.12 14.92,18.55 14.77,18.4 C19.1
N320943: length 4.9
  TOP w0.15: C17.1 Y1.1 15.9,22.7 17.6,21 U1.5
N320947: length 6.8
  TOP w0.15: C18.1 Y1.2 14.52,21.97 16.2,21.97 17.2,20.97 U1.6
N323490: length 5.3
  TOP w0.6: R11.2 C14.2
N323894: length 1.7
  TOP w0.6: R12.1 C15.1 A1.1
N337846: length 4
  TOP w0.6: R11.1 R12.2
N337994: length 5.3
  TOP w0.6: J1.1 R10.1
N415894: length 1.1
  TOP w0.5: C8.1 FL1.2
N420184: length 1.8
  TOP w0.6: C14.1 C13.1 L12.2
N420268: length 1.6
  TOP w0.15: L21.1 18.3,21.8 18.8,21.3 U1.2
N423620: length 21.1
  TOP w0.15: U3.10 9.05,6.8 9.55,6.3 14.25,6.3 ; C24.1 15.9,6.3
  TOP w0.2: U3.2 14.25,6.3 16.9,6.3 ; 22.05,6.8 22.73,6.12 23.38,6.12 24,6.74 P3.A2 ; 22.05,6.8 21.55,6.3 16.9,6.3 ; 22.05,6.8 U4.2 22.05,8.35 C26.1 ; 16.9,6.3 16.85,6.35 U4.10
N423851: length 16.2
  TOP w0.2: C27.1 23.04,0.8 22.89,0.65 22.5,0.65 22.05,1.1 ; 22.05,1.1 U4.19 22.05,2.33 22.7,2.98 22.7,3.78 23.12,4.2 P3.A1 ; 22.05,1.1 21.55,0.6 16.6,0.6 16.4,0.8 C25.1 15.4,0.8 15.2,0.6 14.75,0.6 14.25,1.1 U3.19
N434222: length 1.2
  TOP w0.15: U2.7 26.9,8.7 R20.2

## Copper pours and planes (outline as drawn; the poured copper is in the pictures)
GND on TOP (solid shape): 33.92,44.5 17.52,44.5 17.52,42.7 18.52,42.7 18.52,42.2 19.43,40.88 19.43,38.8 18.97,38.8 18.97,40.73 18.45,41.49 15.32,41.49 15.32,42.7 16.32,42.7 16.32,43.5 10.52,43.5 10.52,40.83 18.52,40.83 18.52,38.8 17.52,38.8 17.52,39.54 16.32,39.54 16.32,38.8 15.32,38.8 15.32,39.54 8.34,39.54 8.34,45.71 33.92,45.71
GND on TOP: 0.45,0.5 0.45,38.8 38.6,38.8 38.6,0.5 ; 5 cut-outs
GND on BOTTOM: 0.45,0.5 0.45,38.8 38.6,38.8 38.6,0.5
VDD_EB on TOP: 29.6,10.8 29.6,11.4 30.1,11.9 30.1,14.6 30.7,14.6 30.7,13.9 31.8,12.8 32.2,12.8 32.4,12.6 32.4,11.4 32.2,11.2 30.9,11.2 30.5,10.8
VDD_EB on BOTTOM: 31.4,12.8 34.4,12.8 34.6,12.6 34.6,11.1 34.4,10.9 31.4,10.9 31.2,11.1 31.2,12.6
N415890 on TOP: 29,14.3 29,10.9 29.1,10.8 29.3,10.8 29.9,11.4 29.9,14.3 29.7,14.5 29.2,14.5
N415894 on TOP: 27.5,10.7 26.2,12 26.2,13.1 27.5,14.4 28,14.4 28,13.1 27.9,13 27.9,10.8 27.8,10.7

## Text on the board
Ref Des/Silkscreen Top: Model: CC2650EM-4XS-ER | Rev:               2.0 | 1.2 cm2 | 2.2-5.5V | 1.8V | (Inp.V)
XSECTION_CHART: L1: TOP CONDUCTOR - COPPER 0.035 MM | *  DIELECTRIC - FR-4 0.73 MM | L2: BOTTOM CONDUCTOR - COPPER 0.035 MM | DESIGN CROSS SECTION CHART | ___________________________ | TOTAL THICKNESS 0.8 MM
NCLEGEND-1-2: FIGURE | SIZE | 0.2 | 1.501 | DRILL CHART: TOP to BOTTOM | ALL UNITS ARE IN MILLIMETERS | PLATED | NON-PLATED | QTY | 278 | 4
